# Altium PCB PCB2.PcbDoc
Units mil, origin at the board's own origin, x right, y up, seen from the top; angles counter-clockwise.
Board outline 2295 x 2275 mil, 2 copper layers (Top Layer, Bottom Layer); 65 components, 55 nets, 304 pads, 221 vias.
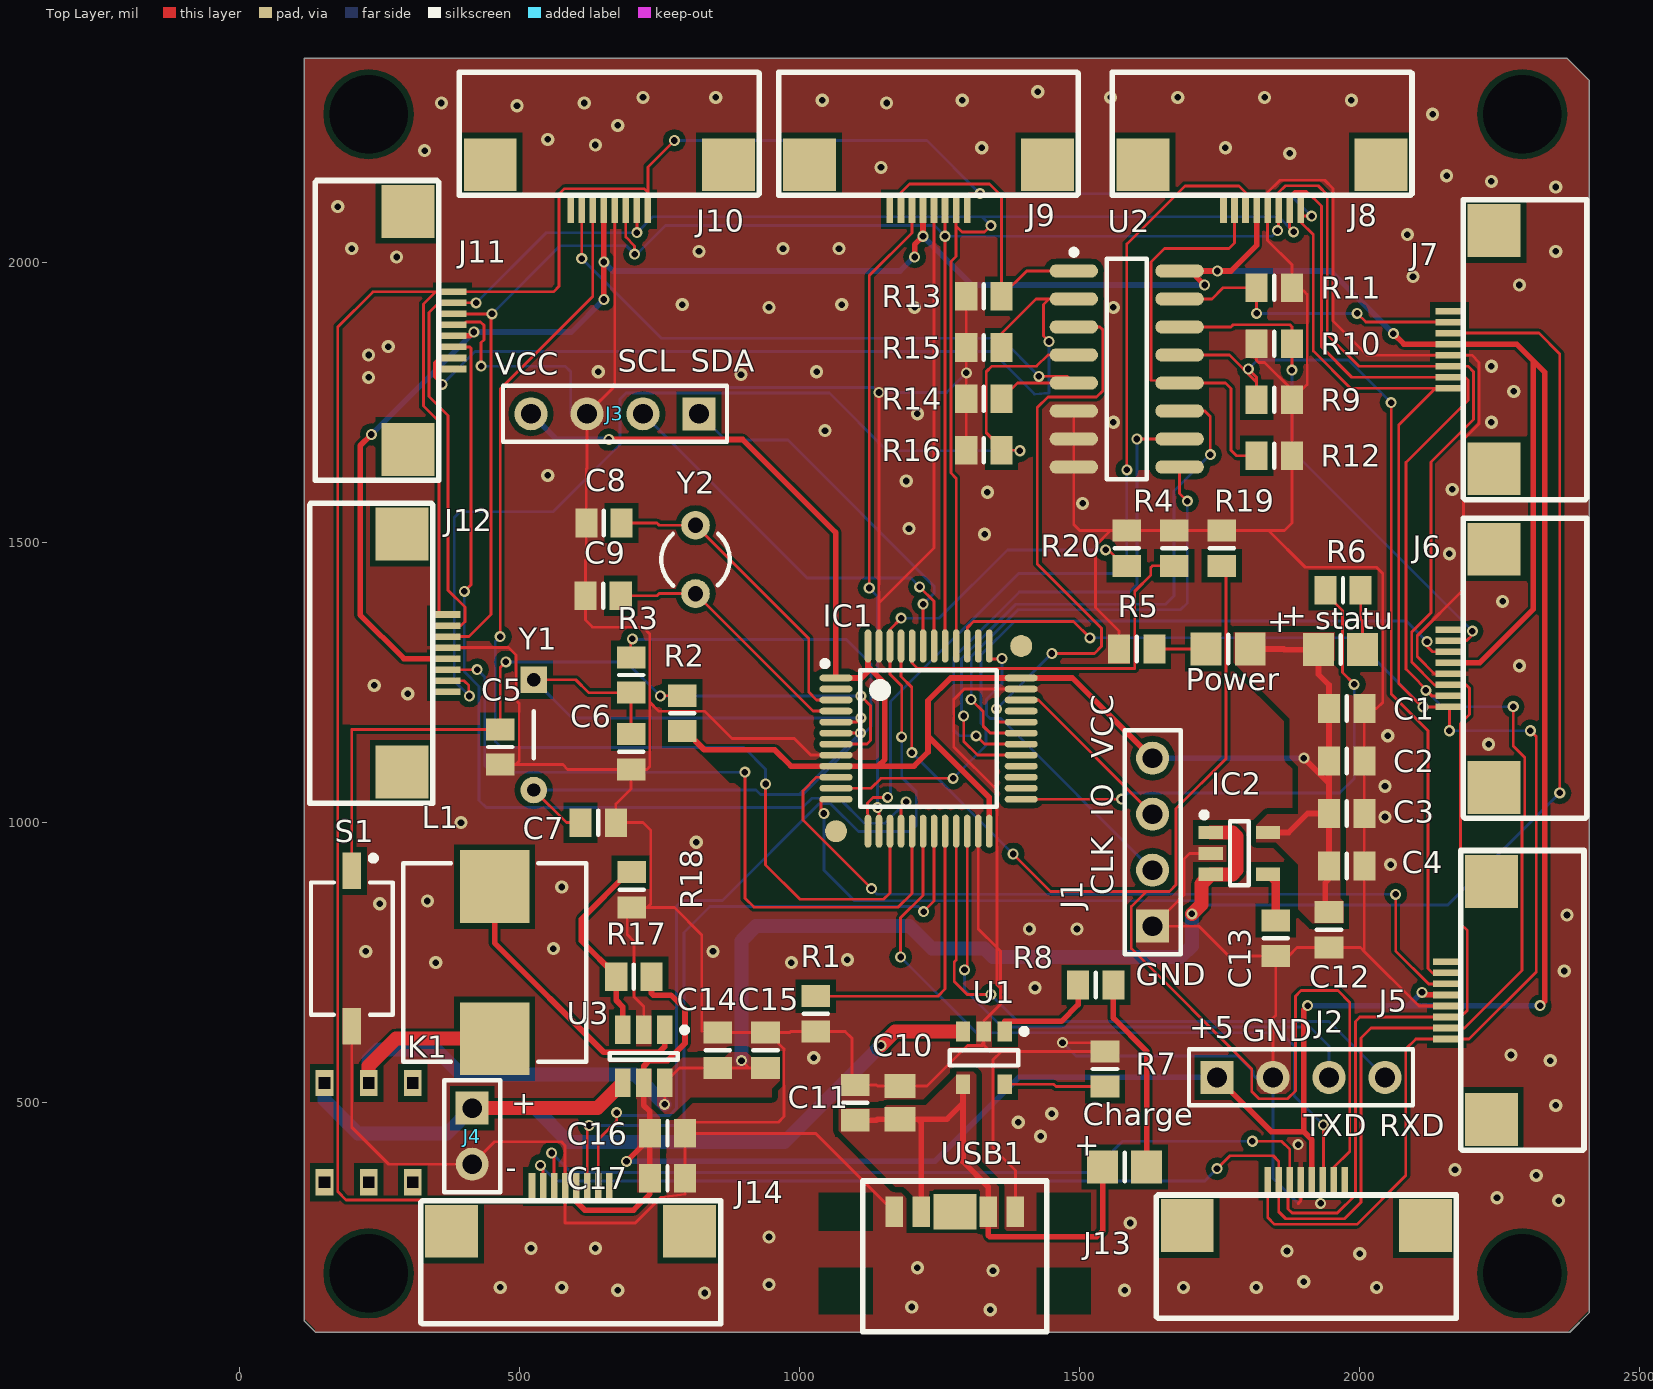
[diagram p0: Top Layer view]
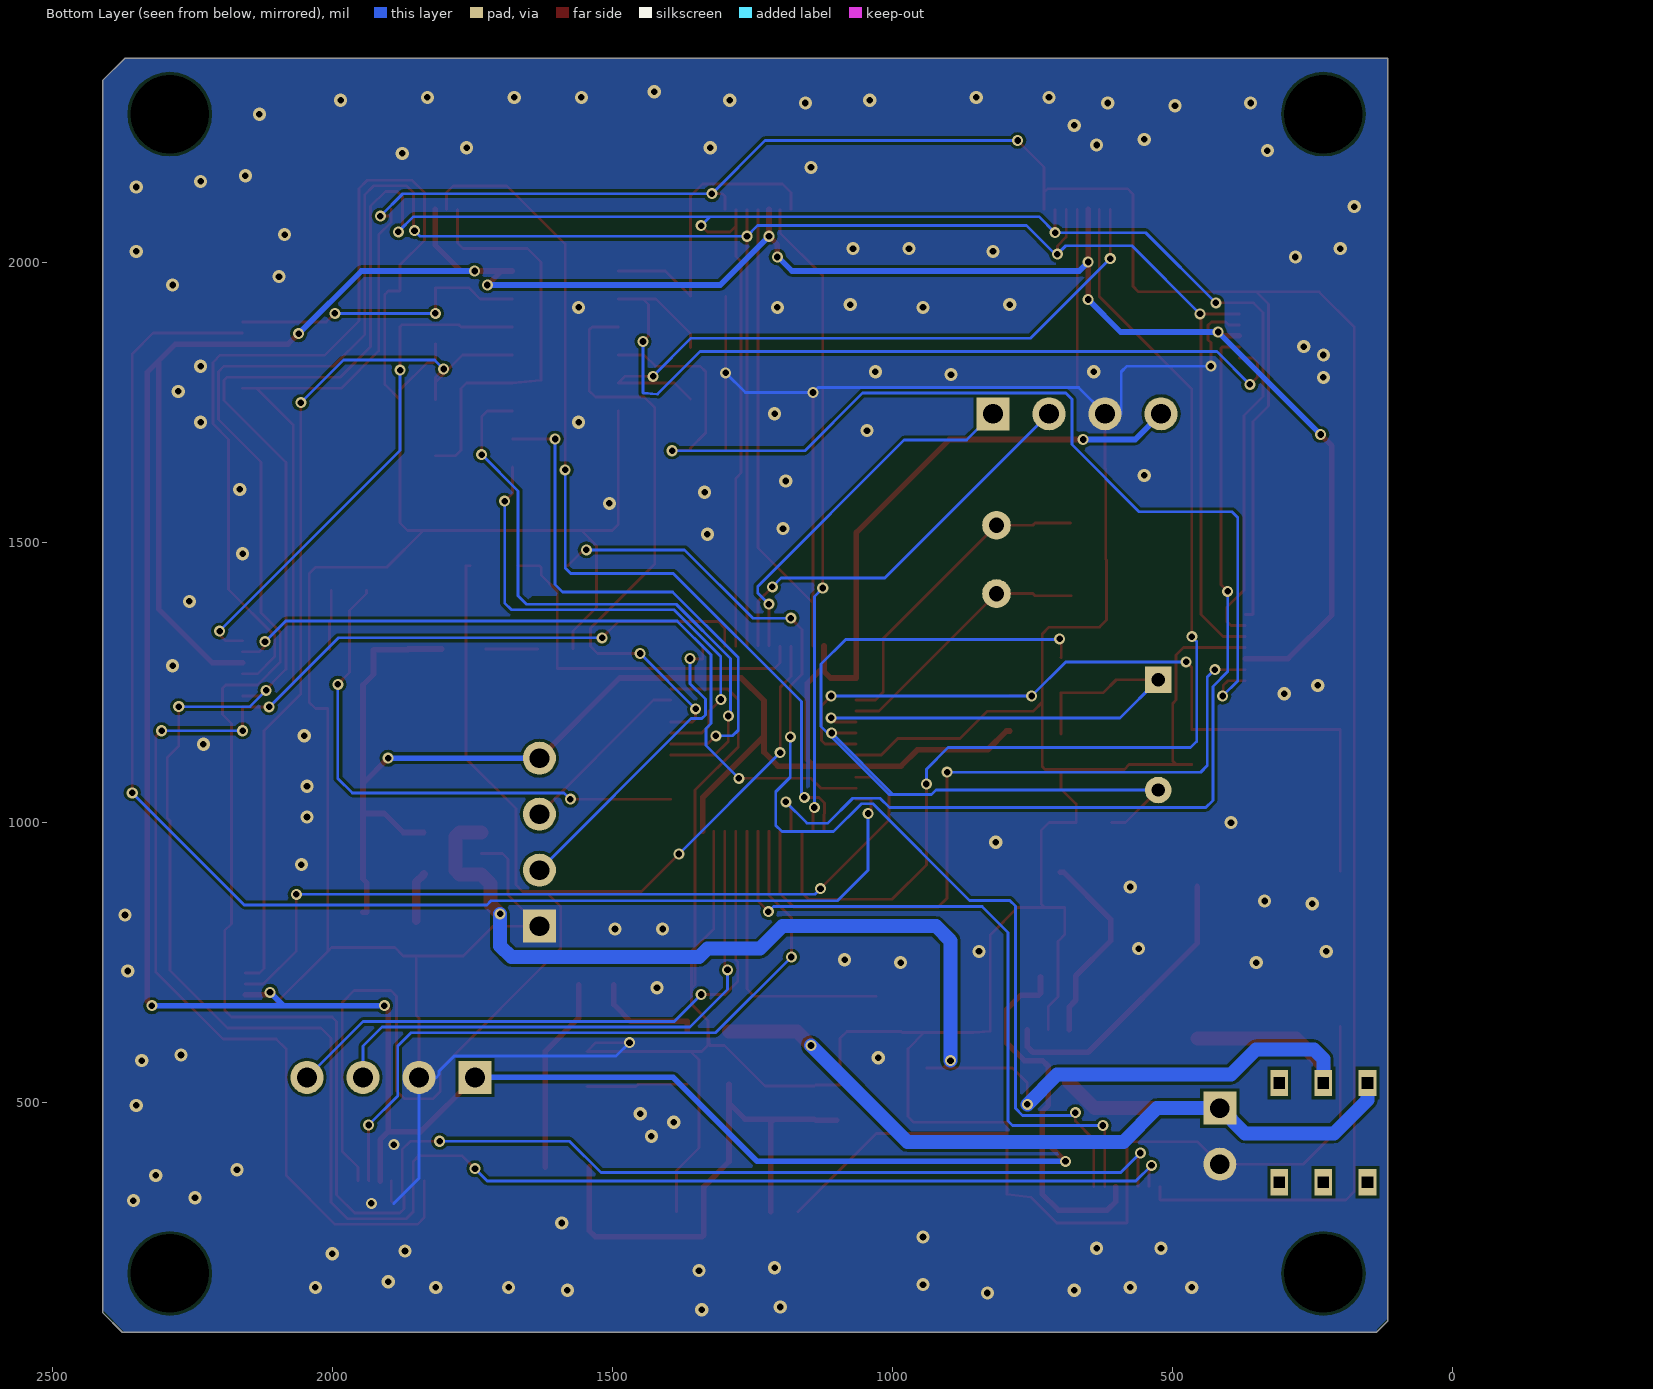
[diagram p1: Bottom Layer view, seen from below]

## Layer stack, top to bottom
Top Solder: solder mask 0.4, Solder Resist, Dk 3.5
Top Layer: signal copper 1.4
Dielectric 1: dielectric 12.6, FR-4, Dk 4.8
Bottom Layer: signal copper 1.4
Bottom Solder: solder mask 0.4, Solder Resist, Dk 3.5

## Board outline
115,110 135,90 2375,90 2410,125 2410,2325 2370,2365 115,2365

## Design rules (kind name [scope] priority, off if disabled: settings)
Clearance Clearance_3 [InNamedPolygon('Top Layer-BAT') Or  InNamedPolygon('Top Layer-No Net') Or  InNamedPolygon('Top Layer-POWER') Or  InNamedPolygon('Top Layer-GND') Or  InNamedPolygon('Top Layer-+5') Or  InNamedPolygon('Top Layer-VCC3.3')] p1: gap=5 ignorepadtopadclearanceinfootprint=FALSE except(10: SMDPad-THPad SMDPad-Fill SMDPad-Poly SMDPad-Region THPad-THPad THPad-Fill THPad-Poly THPad-Region Via-Fill Via-Poly Via-Region Fill-Fill Fill-Poly Fill-Region Poly-Poly Poly-Region Region-Region)
Clearance Clearance_1 [All] p2: gap=5 ignorepadtopadclearanceinfootprint=TRUE
PlaneConnect [All] p1: planeconnectstyle=Direct reliefexpansion=20 reliefentries=4 reliefconductorwidth=10 reliefairgap=10
PolygonConnect [All] p1: connectstyle=Direct reliefconductorwidth=10 reliefentries=4 polygonreliefangle="90 Angle" airgapwidth=10
RoutingVias [All] p1: holewidth=11.81 width=19.68 viastyle="Through Hole" minholewidth=15 minwidth=30 maxholewidth=20 maxwidth=50
SolderMaskExpansion [All] p1: expansion=4
Width [InNet('POWER')] p1: maxlimit=30 minlimit=10 preferedwidth=10 minimp=50.000000 maximp=50.000000 favimp=50.000000
Width Width_2 [InNetClass('All Nets')] p2: maxlimit=25 minlimit=5 preferedwidth=5 minimp=50.000000 maximp=50.000000 favimp=50.000000
29 further rules are at their usual default settings.

## Classes and differential pairs
net class Power: +5 BAT BAT+ POWER VCC3.3

## Components (designator, comment, footprint, x,y, rotation, side; value= is the part's Value field where it differs from the comment)
C1 "0.1uf" 6-0805_L 1976.5,1203.75 r180 top value=104
C2 "1uf" 6-0805_L 1976.5,1110 r180 top
C3 "0.1uf" 6-0805_L 1976.5,1016.25 r180 top value=104
C4 "0.1uf" 6-0805_L 1976.5,922.5 r180 top value=104
C5 "0.1uf" 6-0805_L 465,1135 r90 top value=104
C6 "22pF" 6-0805_L 698.75,1126.5 r90 top
C7 "22pF" 6-0805_L 640,1000 r180 top
C8 "22pF" 6-0805_L 650.25,1535 r0 top
C9 "22pF" 6-0805_L 648.75,1405 r0 top
C10 "1uF" C0805 1178.75,500 r90 top
C11 "0.1uf" 6-0805_L 1098.75,500 r270 top value=104
C12 "2.2uF" 6-0805_L 1945,808.5 r90 top
C13 "470pF" 6-0805_L 1850,793.5 r90 top
C14 "10uF" 6-0805_L 853.75,593.5 r270 top
C15 "0.1uF" 6-0805_L 938.75,593.5 r270 top
C16 "0.1uf" 6-0805_L 763.75,445 r180 top
C17 "22uf" 6-0805_L 763.75,365 r180 top
Charge "LED_Green" 6-0805_M 1580,385 r0 top (schematic designator D3)
IC1 "STM32F103C8T6" LQFP48 1230,1150 r0 top
IC2 "MIC5205-3.3" SOT-23-5 1785,945 r0 top
J1 "CON4" HDR1X4 1630,815 r90 top
J2 "蓝牙" HDR1X4 1745,545 r0 top
J3 "MPU6050" HDR1X4 820,1730 r180 top
J4 "BAT" HDR1X2 415,490 r270 top
J5 "CON7" 8P软排线 2155.28,682.4 r90 top
J6 "CON7" 8P软排线 2160,1275.47 r90 top
J7 "CON7" 8P软排线 2160,1844.53 r90 top
J8 "CON7" 8P软排线 1825.47,2095 r180 top
J9 "CON7" 8P软排线 1229.84,2095 r180 top
J10 "CON7" 8P软排线 659.84,2095 r180 top
J11 "CON7" 8P软排线 380,1878.9 r270 top
J12 "CON7" 8P软排线 369.72,1302.6 r270 top
J13 "CON7" 8P软排线 1904.53,360 r0 top
J14 "CON7" 8P软排线 590.79,350 r0 top
K1 "BUTTON" switch 308.74,535 r270 top
L1 "10UH" 0850 455,750 r90 top
Power "LED_Red" 6-0805_M 1765,1310 r180 top (schematic designator D1)
R1 "10K" 6-0805_L 1028.75,658.5 r270 top
R2 "10K" 6-0805_L 790,1195 r270 top
R3 "10M" 6-0805_L 698.75,1263.5 r90 top
R4 "10K" 6-0805_L 1668.75,1490 r270 top
R5 "1K" 6-0805_L 1601.5,1310 r0 top
R6 "1K" 6-0805_L 1970,1415 r0 top
R7 "330" 6-0805_L 1545,560 r90 top
R8 "330" 6-0805_L 1528.5,710 r0 top
R9 "10K" 6-0805_L 1847.25,1755 r180 top
R10 "10K" 6-0805_L 1847.25,1855 r0 top
R11 "10K" 6-0805_L 1847.25,1955 r180 top
R12 "10K" 6-0805_L 1847.25,1655 r180 top
R13 "10K" 6-0805_L 1328.75,1940 r0 top
R14 "10K" 6-0805_L 1328.75,1756.67 r0 top
R15 "10K" 6-0805_L 1328.75,1848.33 r0 top
R16 "10K" 6-0805_L 1328.75,1665 r0 top
R17 "525K" 6-0805_L 703.75,725 r180 top
R18 "100k" 6-0805_L 700,880 r270 top
R19 "10K" 6-0805_L 1753.75,1490 r270 top
R20 "10K" 6-0805_L 1583.75,1490 r270 top
S1 "KEY_2P" button 200,775 r270 top
statu "LED_Blue" 6-0805_M 1965.63,1308.94 r0 top (schematic designator D2)
U1 "PW4054" SOT-23-CT5_L 1328.75,580 r270 top
U2 "CD4051BCM" M16A_N 1583.75,1810 r0 top
U3 "PS7516" SOT23-6_M 721.35,582.76 r270 top
USB1 "USB" Type-C 1276.73,305 r0 top
Y1 "XTAL_8M" xtal 525,1255 r270 top
Y2 "XTAL_32.768K" R38 813.75,1470 r0 top

## Footprints (in the part's own frame and the unit in brackets; to place one, negate y for a bottom-side part, rotate by r counter-clockwise, add the part's x,y. Pads: shape width x height; smd on the part's side, far side on the other; paste and mask are expansions set on the pad)
6-0805_L [mm] "Chip Resistor, Body 2.0x1.2mm, IPC High Density"
  rect 1x1.3 smd: 1(-0.8,0) 2(0.8,0)
  silkscreen extent 0,-0.55 0,0.55, body extent -1.07,-0.7 1.07,0.7, height 0.7
6-0805_M [mm] "Chip Resistor, Body 2.0x1.2mm, IPC Low Density"
  rect 1.4x1.5 smd: 1(-1,0) 2(1,0)
  silkscreen extent 0,-0.65 0,0.65, body extent -1.07,-0.7 1.07,0.7, height 0.7
8P软排线 [mm] "8P母座"
  rect 0.3x1.25 smd: 1(-1.75,0) 2(-1.25,0) 3(-0.75,0) 4(-0.25,0) 5(0.25,0) 6(0.75,0) 7(1.25,0) 8(1.75,0)
  rect 2.4x2.4 smd: ""(-5.4,-2.025) ""(5.4,-2.025)
  silkscreen extent -6.8,-6.22 6.8,-0.64
0850 [mm] "电感"
  rect 3.3x3.15 smd: 1(-3.45,0) 2(3.45,0)
  silkscreen extent -4.5,-4.15 4.5,4.15, body extent -4.5,-4.15 4.5,4.15, height 5
button [mm] "SODFL, 2-Leads, Body 3.70x8.00mm, IPC Medium Density"
  rect 1.65x0.85 smd: 1(-3.525,0) 2(3.525,0)
  silkscreen extent -4.22,-1.85 3,1.85, body extent -3,-1.85 3,1.85, height 2.5
C0805 [mm] "Chip Capacitor, Body 2.0x1.3mm, IPC High Density"
  rect 1.1x1.4 smd: 1(-0.75,0) 2(0.75,0)
  body extent -1.1,-0.72 1.1,0.72, height 1.4
HDR1X2 [mm] "Connector; Header; 2 Position"
  rect 1.5x1.5 hole 0.9: 1(0,0)
  round 1.5 hole 0.9: 2(2.54,0)
  silkscreen extent -1.27,-1.27 3.81,1.27
HDR1X4 [mm] "Connector; Header; 4 Position"
  rect 1.5x1.5 hole 0.9: 1(0,0)
  round 1.5 hole 0.9: 2(2.54,0) 3(5.08,0) 4(7.62,0)
  silkscreen extent -1.27,-1.27 8.89,1.27, body extent -1.27,-1.27 8.89,1.27, height 8.38
LQFP48 [mm]
  oval 1.5x0.3 smd: 1(-4.2,2.75) 2(-4.2,2.25) 3(-4.2,1.75) 4(-4.2,1.25) 5(-4.2,0.75) 6(-4.2,0.25) 7(-4.2,-0.25) 8(-4.2,-0.75) 9(-4.2,-1.25) 10(-4.2,-1.75) 11(-4.2,-2.25) 12(-4.2,-2.75) 25(4.2,-2.75) 26(4.2,-2.25) 27(4.2,-1.75) 28(4.2,-1.25) 29(4.2,-0.75) 30(4.2,-0.25) 31(4.2,0.25) 32(4.2,0.75) 33(4.2,1.25) 34(4.2,1.75) 35(4.2,2.25) 36(4.2,2.75)
  oval 0.3x1.5 smd: 13(-2.75,-4.2) 14(-2.25,-4.2) 15(-1.75,-4.2) 16(-1.25,-4.2) 17(-0.75,-4.2) 18(-0.25,-4.2) 19(0.25,-4.2) 20(0.75,-4.2) 21(1.25,-4.2) 22(1.75,-4.2) 23(2.25,-4.2) 24(2.75,-4.2) 37(2.75,4.2) 38(2.25,4.2) 39(1.75,4.2) 40(1.25,4.2) 41(0.75,4.2) 42(0.25,4.2) 43(-0.25,4.2) 44(-0.75,4.2) 45(-1.25,4.2) 46(-1.75,4.2) 47(-2.25,4.2) 48(-2.75,4.2)
  round 1 smd: 49(-4.2,-4.2) 50(4.2,4.2)
  silkscreen extent -4.82,-3.1 3.1,3.52, body extent -4.49,-4.5 4.5,4.5, height 1.6
M16A_N [mm] "SOIC, 16-Leads, Body 9.9x3.9mm, Pitch 1.27mm, IPC Medium Density"
  oval 2.2x0.6 smd: 1(-2.4,4.445) 2(-2.4,3.175) 3(-2.4,1.905) 4(-2.4,0.635) 5(-2.4,-0.635) 6(-2.4,-1.905) 7(-2.4,-3.175) 8(-2.4,-4.445) 9(2.4,-4.445) 10(2.4,-3.175) 11(2.4,-1.905) 12(2.4,-0.635) 13(2.4,0.635) 14(2.4,1.905) 15(2.4,3.175) 16(2.4,4.445)
  silkscreen extent -2.52,-5 0.9,5.42, body extent -2,-5 2,5, height 1.75
R38 [mm] "Crystal, Thru-Hole; 2 Leads; Body 3.1 x 8.2 mm (Dia.xH)"
  round 1.3 hole 0.7: 1(0,1.55) 2(0,-1.55)
  silkscreen extent -1.55,-1.19 1.55,1.17
SOT23-6_M [mm] "SOT23, 6-Leads, Body 2.9x1.6mm, Pitch 0.95mm, Lead Span 2.7mm, IPC Low Density"
  rect 1.3x0.7 smd: 1(-1.2,0.95) 2(-1.2,0) 3(-1.2,-0.95) 4(1.2,-0.95) 5(1.2,0) 6(1.2,0.95)
  silkscreen extent -1.32,-1.55 0.15,1.98, body extent -0.9,-1.55 0.9,1.55, height 1.45
SOT-23-5 [mm]
  rect 1.1x0.6 smd: 1(-1.3,0.95) 2(-1.3,0) 3(-1.3,-0.95) 4(1.3,-0.95) 5(1.3,0.95)
  silkscreen extent -1.72,-1.45 0.42,1.87, body extent -1.37,-1.45 1.43,1.45, height 1.45
SOT-23-CT5_L [mm] "SOT23, 5-Leads, Body 2.9x1.6mm, Pitch 0.95mm, Lead Span 2.7mm, IPC High Density"
  rect 0.9x0.65 smd: 1(-1.2,0.95) 2(-1.2,0) 3(-1.2,-0.95) 4(1.2,-0.95) 5(1.2,0.95)
  silkscreen extent -1.32,-1.55 0.35,1.95, body extent -0.9,-1.55 0.9,1.55, height 1.45
switch [mm]
  rect 1.2x0.8 hole 0.5 square: 1(0,0) 2(0,-2) 3(0,-4) 4(4.5,0) 5(4.5,-2) 6(4.5,-4)
Type-C [mm] "贴片母头"
  rect 0.8x1.4 smd: 1(-2.75,0) 1(2.75,0) 2(-1.52,0) 2(1.52,0) ""(-0.5,0) ""(0.5,0)
  rect 1.95x1.2 smd: ""(0,0) ""(0,0)
  rect 1.95x1.6 smd: ""(0,0) ""(0,0)
  silkscreen extent -4.17,-5.44 4.17,1.4
xtal [mm]
  rect 1.2x1.2 hole 0.6: 1(0,0)
  round 1.2 hole 0.6: 2(5,0)
  silkscreen extent 1.43,0 3.56,0

## Part data
C1 C2 C3 C4 C5 C6 C7 C8 C9 C11 C12 C13 C14 C15 C16 C17: library part "Cap Semi", "Capacitor (Semiconductor SIM Model)", LatestRevisionDate=29-May-2009, LatestRevisionNote="IPC-7351 Footprint Added.", PackageDescription="Chip Capacitor", PackageReference=C1206, Published=8-Jun-2000, Publisher="Altium Limited"
C10: library part "Cap Pol3", "Polarized Capacitor (Surface Mount)", LatestRevisionDate=29-May-2009, LatestRevisionNote="IPC-7351 Footprint Added.", PackageDescription="Chip Capacitor", PackageReference=C0805, Published=8-Jun-2000, Publisher="Altium Limited"
Charge Power statu: library part LED, "LED"
IC1: "单片机", ComponentLink1Description="Manufacturer Link", ComponentLink1URL=www.st.com/stm32, ComponentLink2Description=Datasheet, ComponentLink2URL=http://www.st.com/stonline/products/literature/ds/13587.pdf, DatasheetVersion="rev6, Mar-2008", PackageDescription="48-Pin Low-Profile Quad Flat Pack, 7 x 7 mm Body, 0.5 mm Pitch (LQFP48)", PackageReference=LQFP48, PackageVersion=Mar-2008, Published=30-May-2008, Publisher="Altium Limited"
IC2: "稳压"
J1: "连接器"
J2 J3: library part CON4, "Connector"
J4 USB1: library part CON2, "Conjunctor"
J5 J6 J7 J8 J9 J10 J11 J12 J13 J14: "Connector"
K1: "自锁按键"
L1: library part Inductor, "电感"
R1 R2 R3 R4 R5 R6 R7 R8 R9 R10 R11 R12 R13 R14 R15 R16 R17 R18 R19 R20: library part Res3, "Resistor", LatestRevisionDate=29-May-2009, LatestRevisionNote="IPC-7351 Footprint Added.", PackageDescription="Chip Resistor", PackageReference=J1-0603, Published=8-Jun-2000, Publisher="Altium Limited"
S1: "轻触按键2P"
U2: "8-Channel Analog Multiplexer/Demultiplexer", Code_IPC=SOIC127P600-16, ComponentLink1Description="Manufacturer Link", ComponentLink1URL=http://www.fairchildsemi.com/, ComponentLink2Description=Datasheet, ComponentLink2URL=http://www.fairchildsemi.com/ds/CD%2FCD4052BC.pdf, DatasheetVersion=Jan-1999, LatestRevisionDate=13-Apr-2006, LatestRevisionNote="IPC-7351 Footprint Added.", PackageDescription="16-Pin Small Outline Integrated Circuit 1.27 mm Pitch", PackageReference=M16A, PackageVersion=2000, Published=17-Jul-2002, Publisher="Altium Limited"
Y1 Y2: library part XTAL, "Crystal Oscillator", LatestRevisionDate=17-Jul-2002, LatestRevisionNote="Re-released for DXP Platform.", PackageDescription="Crystal, Thru-Hole; 2 Leads; Body 3.1 x 8.2 mm (Dia.xH)", PackageReference=R38, Published=8-Jun-2000, Publisher="Altium Limited"

## Free pads (board coordinates)
  rect 47.24x31.5 hole 140: ""(230,195) ""(230,2265) ""(2290,195) ""(2290,2265)

## Via types
v1: diameter 23.62, hole 11.81, Top Layer to Bottom Layer, tented both sides, 116 vias
v2: diameter 19.68, hole 11.81, Top Layer to Bottom Layer, tented both sides, 105 vias

## Nets (pads, with @x,y where several pads share a name; then routed paths per layer and width w, separated by ;. In a path a pad name is that pad's centre, name@x,y a point inside that pad or via, vN(x,y) a via of type N, cw(c..) or ccw(c..) an arc to the next point about the centre after c; other vN are vias at no path point)
+5: C16.2 C17.2 J2.1 J5.5 J6.5 J7.5 J8.5 J9.5 J10.5 J11.5 J12.5 J13.5 J14.5 R17.1 U2.16 U3.5 | length 7969.5
  Top Layer w10: v2(235,1693) 215,1673 215,1370.76 293,1292.76 J12.5 ; J11.5 411.06,1869.06 v2(418,1876) ; J14.5 600.63,323.26 616,307.89 703.15,307.89 732.25,337 C17.2 C16.2@732.25,436.75 ; v2(650,1934) v2(650,2001) J10.5 ; v2(690.51,395) C16.2@732.25,436.75 ; R17.1 735.25,695 738.25,692 770,692 795,667 795,606 764,575 731.35,575 721.35,565 U3.5 721.35,494.91 732.25,484 C16.2 C16.2@732.25,436.75 ; v2(1205,2010) 1205,2032 v2(1220,2047) J9.5 ; U2.16 U2.16@1698,1985 ; v2(1723,1960) U2.16@1698,1985 ; J2.1 1842,448 1900,448 ; J8.5 1815.63,2030.63 1770,1985 v2(1745.47,1985) U2.16@1698,1985 ; v2(1907,673) 1900,666 1900,448 ; J13.5 1914.37,433.63 1900,448 ; v2(2060,1873) 2078.63,1854.37 J7.5 2280,1854.37 2310,1824.37 ; v2(2111,697) 2115.76,692.24 J5.5 ; J6.5 2214,1285.31 2310,1381.31 2310,1824.37 ; v2(2322,673) 2330,681 2330,1804.37 2310,1824.37
  Bottom Layer w10: v2(235,1693) v2(418,1876) 592,1876 v2(650,1934) ; v2(650,2001) 666,1985 1179,1985 1204,2010 v2(1205,2010) ; v2(690.51,395) 1241,395 1391,545 J2.1 ; v2(1220,2047) 1307,1960 v2(1723,1960) ; v2(1745.47,1985) 1948,1985 v2(2060,1873) ; v2(1907,673) 2087,673 ; v2(2111,697) 2087,673 ; v2(2322,673) 2087,673
ADC0: IC1.10 J5.6 | length 1451.4
  Top Layer w5: IC1.10 1030,1081.1 1005.66,1056.76 1005.66,1004.34 v2(1128,882) ; v2(2064,872) 2064,770.93 2123,711.93 J5.6
  Bottom Layer w5: v2(1128,882) 1138,872 v2(2064,872)
ADC1: IC1.11 J6.6 | length 1353.7
  Top Layer w5: IC1.11 1127.44,1061.42 1145.05,1079.03 v2(1273.72,1079.03) ; v2(2120,1323) 2120,1315 2130,1305 J6.6
  Bottom Layer w5: v2(1273.72,1079.03) 1332.34,1137.66 1332.34,1168.06 1323.64,1176.77 1323.64,1299.64 1384,1360 2083,1360 v2(2120,1323)
ADC2: IC1.12 J7.6 | length 2574.3
  Top Layer w5: v2(1043,1016.22) 1038,1021.22 1038,1041.73 IC1.12 ; J7.6 2319.94,1874.06 2357,1837 v2(2357,1053)
  Bottom Layer w5: v2(1043,1016.22) 1043,915 1097.66,860.34 1716.26,860.34 1723.61,853 2157,853 v2(2357,1053)
ADC3: IC1.13 J8.6 | length 1652.6
  Top Layer w5: IC1.13 1121.73,995 1121,1035 1131,1045 v2(1157,1045) ; v2(1584,1630) 1584,2033 1688,2137 1783.94,2137 1795.94,2125 J8.6
  Bottom Layer w5: v2(1157,1045) 1162,1050 1162,1216 1391,1445 1574,1445 1584,1455 v2(1584,1630)
ADC4: IC1.14 J9.6 | length 1149.2
  Top Layer w5: v2(1124,1419) 1124,1976.69 1200.31,2053 J9.6 ; v2(1139,1027) 1141.42,1024.58 IC1.14
  Bottom Layer w5: v2(1124,1419) 1139,1404 v2(1139,1027)
ADC5: IC1.15 J10.6 | length 2058.4
  Top Layer w5: v2(465,1332) 465,1774 630.31,1939.31 J10.6 ; v2(939,1069) 939,924.31 1000,863.31 1150,863.31 1161.1,874.41 IC1.15
  Bottom Layer w5: v2(465,1332) 456.34,1323.34 456.34,1145 467.34,1134 900.18,1134 939,1095.18 v2(939,1069)
ADC6: IC1.16 J11.6 | length 1722.1
  Top Layer w5: J11.6 410.63,1849.37 412.68,1847.32 412.68,1424.68 v2(401,1413) ; IC1.16 1180.79,1027.79 v2(1190,1037)
  Bottom Layer w5: v2(401,1413) 401,1269.4 427.34,1243.05 427.34,1039.66 440,1027 1005,1027 1021.57,1043.57 1070.34,1043.57 1114.91,999 1152,999 v2(1190,1037)
ADC7: IC1.17 J12.6 | length 1352.1
  Top Layer w5: J12.6 v2(424,1273.07) ; v2(902,1090) 902,865 918.03,848.97 1175.86,848.97 1200.47,873.58 IC1.17
  Bottom Layer w5: v2(424,1273.07) 437.34,1259.73 437.34,1101.66 449,1090 v2(902,1090)
ADC8: IC1.18 J13.6 | length 1273.1
  Top Layer w5: v2(1180,760) 1180,830 1220.16,870.16 IC1.18 ; J13.6 1935,360.94 v2(1935,460)
  Bottom Layer w5: v2(1180,760) 1315.22,624.78 1859.22,624.78 1883,601 1883,512 v2(1935,460)
ADC9: IC1.19 J14.6 | length 1222.4
  Top Layer w5: J14.6 620.32,455.45 v2(624,459.13) ; v2(1221,841) 1239.84,859.84 IC1.19
  Bottom Layer w5: v2(624,459.13) 785.13,459.13 793,467 793,804 839.34,850.34 1211.66,850.34 v2(1221,841)
Address_0: IC1.29 U2.11 | length 1094
  Top Layer w5: v2(1292.66,1190.34) 1292.66,1145 1317.18,1120.47 IC1.29 ; U2.11 1723,1735 1733,1725 v2(1733,1657)
  Bottom Layer w5: v2(1292.66,1190.34) 1288.66,1194.34 1288.66,1292.94 1385.71,1390 1653,1390 1668,1405 1668,1592 v2(1733,1657)
Address_1: IC1.30 U2.10 | length 977.7
  Top Layer w5: v2(1315,1155) 1329.84,1140.16 IC1.30 ; v2(1602,1685) U2.10
  Bottom Layer w5: v2(1315,1155) 1285,1155 1275,1165 1275,1295 1392,1412 1589,1412 1602,1425 v2(1602,1685)
Address_2: IC1.31 U2.9 | length 880.1
  Top Layer w5: v2(1306,1219.77) 1327.69,1198.08 1327.69,1172.16 1340,1159.84 IC1.31 ; U2.9 1678.24,1587.76 v2(1692,1574)
  Bottom Layer w5: v2(1306,1219.77) 1306,1296.14 1389.86,1380 1680,1380 1692,1392 v2(1692,1574)
Address_3: IC1.39 J5.1 J6.1 J7.1 J8.1 J9.1 J10.1 J11.1 J12.1 J13.1 J14.1 | length 8291.1
  Top Layer w5: J12.1 356,1371.5 356,1716 327.89,1744.11 327.89,1925.89 349.8,1947.8 ; J14.1 521.89,326 190,326 175,341 175,1885 237.8,1947.8 349.8,1947.8 ; J10.1 728.74,2125 ; v2(776,2218) 728.74,2170.74 728.74,2125 ; J9.1 1298.74,2119 1302.74,2123 v2(1322,2123) ; IC1.39 1298.9,1347.9 1310,1359 1489,1359 v2(1518,1330) ; J13.1 1835.63,295 1847.97,282.66 1994.66,282.66 2082.03,370.03 2082.03,595.53 2100,613.5 J5.1 2195,613.5 2315,733.5 2315,1153.47 v2(2304.47,1164) ; J8.1 J8.1@1894.37,2083 ; v2(1914,2083) J8.1@1894.37,2083 ; v2(2160,1164) J6.1 v2(2112.43,1206.57) 2111.43,1206.57 2069.46,1248.54 2069.46,1710.09 2135,1775.63 ; J7.1 2135,1775.63 ; 349.8,1947.8 J11.1 560,1947.8 570,1957.8 570,2122 580,2132 721.74,2132 728.74,2125 ; J8.1@1894.37,2083 1894.37,2072.34 1917,2049.71 1917,1842 1983.37,1775.63 2135,1775.63
  Bottom Layer w5: v2(776,2218) 1227,2218 v2(1322,2123) 1874,2123 v2(1914,2083) ; v2(1518,1330) 1989,1330 v2(2112.43,1206.57) ; v2(2160,1164) v2(2304.47,1164)
Address_4: IC1.40 J5.2 J6.2 J7.2 J8.2 J9.2 J10.2 J11.2 J12.2 J13.2 J14.2 | length 7439.7
  Top Layer w5: J12.2 395,1351.81 402,1358.81 402,1385 372,1415 372,1727 337.89,1761.11 337.89,1911 355,1928.11 J11.2 v2(422,1928.11) ; v2(537,388) 541.57,383.43 J14.2 ; v2(709.06,2053.34) J10.2 ; J9.2 1279.06,2065 ; IC1.40 1279.21,1614.79 1270,1624 1270,2001.94 1279.06,2011 1279.06,2065 ; v2(1341,2066) 1329.62,2054.62 1289.43,2054.62 1279.06,2065 ; v2(1745,382) 1768,405 1845.32,405 1855.32,395 J13.2 1855.32,305 1867.66,292.66 1972.66,292.66 2002.03,322.03 2002.03,615.22 2020,633.19 J5.2 2186.94,633.19 2289.75,736 2289.75,1003.28 2294.47,1008 2294.47,1116.53 2274,1137 v2(2274,1207) ; v2(1882,2055) 1874.69,2062.31 J8.2 1874.69,2118 1883.79,2127.11 1905,2127.11 1931.34,2100.76 1931.34,1849.66 1985.68,1795.32 J7.2 2187.68,1795.32 2193,1790 2193,1754 2082.31,1643.31 2082.31,1273.95 2130,1226.26 ; v2(2118,1236) 2127.74,1226.26 2130,1226.26 ; J6.2 2130,1226.26
  Bottom Layer w5: v2(422,1928.11) 547.23,2053.34 v2(709.06,2053.34) 737.71,2082 1325,2082 ; v2(537,388) 565,360 1723,360 v2(1745,382) ; v2(1341,2066) 1325,2082 ; v2(1882,2055) 1855,2082 1325,2082 ; v2(2118,1236) 2147,1207 v2(2274,1207)
Address_5: IC1.41 J5.3 J6.3 J7.3 J8.3 J9.3 J10.3 J11.3 J12.3 J13.3 J14.3 | length 7225.6
  Top Layer w5: J12.3 409.13,1332.13 448.69,1371.69 v2@448.69,1908.43 ; J11.3 v2@448.69,1908.43 ; v2(450.43,1908.43) v2@448.69,1908.43 ; v2(557,410) 561.26,405.74 J14.3 ; J10.3 689.37,2045.37 705,2029.74 v2(705,2015) ; J9.3 v2(1259.37,2047) IC1.41 ; v2(1808,431) 1860,431 1875,416 J13.3 1875,338 1872,335 1872,310 1879.34,302.66 1959.66,302.66 1992.03,335.03 1992.03,644.9 2000,652.87 J5.3 2180,652.87 2192,664.87 2192,807 2180,819 2180,1177 2196,1193 2196,1240 2190.06,1245.94 J6.3 2133.44,1245.94 2092.66,1286.73 2092.66,1340.34 2127,1374.69 2127,1643.68 2203,1719.68 2203,1805 2193,1815 J7.3 1998,1815 1942,1871 1942,2120.87 1925.76,2137.11 1867.11,2137.11 1855,2125 J8.3 1855,2059 v2(1853,2057)
  Bottom Layer w5: v2(450.43,1908.43) 572,2030 690,2030 v2(705,2015) 709,2015 760,2066 1240.37,2066 v2(1259.37,2047) 1843,2047 v2(1853,2057) ; v2(557,410) 592,375 1520,375 1576,431 v2(1808,431)
BAT: J4.1 K1.3 U1.3 U3.4 | length 1607.9
  Top Layer w25: J4.1 638.43,490 U3.4 ; v2(1145,602) 1170.24,627.24 U1.3
  Bottom Layer w25: K1.3 151.26,505 211.26,445 370,445 J4.1 527,490 587,430 973,430 v2(1145,602)
BAT+: C14.2 C15.2 IC2.1 IC2.3 K1.2 L1.1 U3.6 | length 2502.5
  Top Layer w5: v2(758.75,497) U3.6 785.25,562.01 C14.2 908.99,562.01 ; v2(896,575) 908.99,562.01 ; C15.2 908.99,562.01
  Top Layer w25: K1.2 230,565 279.17,614.17 L1.1 ; v2(1700,837) 1717,854 1717,890.78 IC2.3 1772.6,907.6 1780,915 1780,975 1772.6,982.4 IC2.1
  Bottom Layer w25: K1.2 230,577.84 247.16,595 350,595 395,550 705.75,550 v2(758.75,497) ; v2(896,575) 896,789 922,815 1196,815 1236,775 1330,775 1345,760 1680,760 1700,780 v2(1700,837)
BOOT0: IC1.44 R4.2 | length 667.5
  Top Layer w5: IC1.44 1200.47,1285 1210.47,1275 1598,1275 1598,1413 1626.84,1441.84 1626.84,1455.35 1630,1458.5 R4.2
BOOT1: IC1.20 R1.1 | length 517.8
  Top Layer w5: R1.1 1246.54,690 1259.53,702.98 IC1.20
Common_Out: IC1.32 U2.3 | length 1064.9
  Top Layer w5: v2(1351,1203) 1351,1185 1356.47,1179.53 IC1.32 ; v2(1450,1302) 1526,1302 1539,1315 1539,1347 1424,1462 1424,1741 1443,1760 1530,1760 1541,1771 1541,1880 1536,1885 U2.3
  Bottom Layer w5: v2(1351,1203) v2(1450,1302)
EX0: J5.7 R9.2 U2.13 | length 1586.3
  Top Layer w5: U2.13 1767,1835 1815.76,1786.24 ; v2(1801,1810) 1815.76,1795.24 1815.76,1786.24 ; R9.2 1815.76,1786.24 ; v2(2056,1750) 2056,1230 2122,1164 2122,739.61 2130,731.61 J5.7
  Bottom Layer w5: v2(1801,1810) 1817,1826 1980,1826 v2(2056,1750)
EX1: J6.7 R10.2 U2.14 | length 932.7
  Top Layer w5: U2.14 1770,1885 1774,1889 1875,1889 1878.75,1885.25 R10.2 v2(1878.75,1808) ; J6.7 2190.69,1324.69 2201,1335 v2(2201,1342)
  Bottom Layer w5: v2(1878.75,1808) 1878.75,1664.25 v2(2201,1342)
EX2: J7.7 R11.2 U2.15 | length 542.2
  Top Layer w5: U2.15 1736,1935 1756,1955 R11.2 v2(1815.76,1909.24) ; v2(1995.26,1909.24) 2010.76,1893.74 J7.7
  Bottom Layer w5: v2(1815.76,1909.24) v2(1995.26,1909.24)
EX3: J8.7 R12.2 U2.12 | length 741.6
  Top Layer w5: J8.7 1776.26,2035 1766.26,2025 1651,2025 1627,2001 1627,1790 U2.12 1760,1785 1770,1775 1770,1665 1780,1655 R12.2
EX4: J9.7 R13.2 U2.1 | length 551.6
  Top Layer w5: J9.7 1180.63,2125 1196.06,2140.43 1339,2140.43 1360.25,2119.18 R13.2 1405.25,1985 U2.1
EX5: J10.7 R14.2 U2.5 | length 1199.3
  Top Layer w5: v2(610.63,2007) J10.7 ; R14.2 1388.58,1785 U2.5 1477.26,1797 v2(1427,1797)
  Bottom Layer w5: v2(610.63,2007) 752.63,1865 1359,1865 v2(1427,1797)
EX6: J11.7 R15.2 U2.2 | length 1575.4
  Top Layer w5: v2(361.45,1782.45) 347.89,1796 347.89,1821.58 356,1829.69 J11.7 ; R15.2 1360.25,1873.25 1422,1935 1445,1935 ; v2(1445,1859) 1435,1869 1435,1925 1445,1935 ; U2.2 1445,1935
  Bottom Layer w5: v2(361.45,1782.45) 420,1841 1343,1841 1419,1765 1445,1767 v2(1445,1859)
EX7: J12.7 R16.2 U2.4 | length 1937.6
  Top Layer w5: J12.7 400.61,1253.39 409,1245 409,1227 v2(410,1226) ; v2(1393,1664) 1392,1665 R16.2 1360.25,1669 1333,1696.25 1333,1805 1343,1815 1423,1815 1443,1835 U2.4
  Bottom Layer w5: v2(410,1226) 383,1253 383,1545 393,1555 559,1555 679,1675 679,1756.03 690,1767.03 1052.97,1767.03 1156,1664 v2(1393,1664)
EX8: IC1.45 J13.7 R19.2 | length 2547.6
  Top Layer w5: IC1.45 1180.79,1261 1200,1241.79 v2(1200,1125) ; v2(1381,944) 1448,877 1619,877 ; R19.2 1761,1458.5 1761,1114 1672,1025 1672,889 1660,877 1619,877 ; J13.7 1953.74,384.74 1982.03,413.03 1982.03,678.97 1961,700 1895,700 1885,690 1885,521 1871,507 1820,507 1807,520 1807,560 1592,775 1592,850 1619,877
  Bottom Layer w5: v2(1200,1125) v2(1381,944)
EX9: IC1.46 J14.7 R20.2 | length 2012.7
  Top Layer w5: J14.7 640,434 673,467 v2(673,482.13) ; v2(1181.1,1365) 1161.1,1345 IC1.46 1161.1,1265 1182,1244.1 v2(1182,1153) ; v2(1546,1487) 1551.5,1487 1580,1458.5 R20.2
  Bottom Layer w5: v2(673,482.13) 678.13,477 767.03,477 780,489.97 780,851 790,861 862,861 1034.57,1033.57 1055,1033.57 1104.57,984 1197,984 1208,995 1208,1055 1182,1081 v2(1182,1153) ; v2(1181.1,1365) 1248.85,1365 1370.85,1487 v2(1546,1487)
GND: C1.1 C2.1 C3.1 C4.1 C5.1 C6.1 C7.1 C8.1 C9.1 C10.2 C11.1 C12.1 C13.1 C14.1 C15.1 C16.1 C17.1 IC1.8 IC1.23 IC1.35 IC1.47 IC2.2 J1.1 J2.2 J3.3 J4.2 J5.4 J6.4 J7.4 J8.4 J9.4 J10.4 J11.4 J12.4 J13.4 J14.4 R1.2 R4.1 R5.1 R7.2 R9.1 R10.1 R11.1 R12.1 R13.1 R14.1 R15.1 R16.1 R18.2 R19.1 R20.1 S1.2 U1.2 U2.6 U2.7 U2.8 U3.2 USB1.1 | length 15482.8
  Top Layer w5: S1.2 200,456 266,390 J4.2 455.03,430.03 574.34,430.03 580.94,423.43 J14.4 580.94,285 706.25,285 752.25,331 795.25,336.25 C17.1 C16.1 ; J12.4 480,1312.44 493,1299.44 493,1219 499,1213 499,1110 492.5,1103.5 ; J11.4 399,1888.74 404.26,1894 430,1894 436,1888 436,1862 431,1857 v2(431,1815) ; C5.1 492.5,1103.5 ; J10.4 669.69,1779.69 J3.3 620,1632.25 618.75,1631 C8.1 618.75,1470.5 617.25,1469 C9.1 617.25,1361.75 630,1349 720,1349 732,1337 732,1215 ; U3.2 721.35,671.65 704,689 704,788 692,800 692,848.5 R18.2 727.5,848.5 ; IC1.8 1019.53,1120.47 990,1150 879,1150 830,1199 748,1199 732,1215 ; IC1.47 1141.42,1392 ; v2(1141.42,1768) 1141.42,1392 ; USB1.1@1168.46,305 1028.46,445 C16.1 ; J9.4 1239.69,1490.27 1141.42,1392 ; R16.1 R14.1 v2(1297.25,1803) R15.1 R13.1 ; IC1.23 1318.58,810.17 1352,776.75 ; USB1.1@1385,305 1385,379 1345,419 1345,576.5 1360,591.5 ; IC1.35 1293.58,1238.58 1275,1220 1275,1135 1352,1058 1352,776.75 ; v2(1469,607) 1529.5,607 R7.2 1360,591.5 ; U2.6 U2.7 U2.8 1489.26,1532.23 1500,1521.5 1555,1521.5 ; R5.1 1570,1341.97 1527.97,1384 1527.97,1494.47 1555,1521.5 ; IC2.2 1696,945 1686,935 1686,871 J1.1 1713,815 1765.99,762.01 C13.1 ; R10.1 1815.76,1825 1818.95,1821.81 1829.94,1821.81 1878.75,1773 R9.1 ; J2.2 1845,651 1850,656 C13.1 ; 1890,320 1894.69,324.69 J13.4 ; J5.4 2105.44,672.56 ; J6.4 2133.37,1265.63 2102.66,1296.34 2102.66,1333.66 2184.98,1415.98 2184.98,1684.15 2213,1712.18 2213,1821.69 2200,1834.69 J7.4 2013.15,1834.69 1952,1895.83 1952,2132.51 1937.4,2147.11 1857.42,2147.11 1835.31,2125 J8.4 1835.31,2039.66 1878.75,1996.22 R11.1 1878.75,1949 1900,1949 1906,1943 1906,1782.25 R9.1 ; 492.5,1103.5 577,1103.5 585.5,1095 C6.1 ; C6.1 727,1095 732,1100 732,1215 ; C6.1 698.75,1060.25 671.5,1033 C7.1 720,1000 734,986 734,855 727.5,848.5 ; 727.5,848.5 776,848.5 825,799.5 825,627.5 C14.1 C15.1 C15.1@943,625 ; C16.1 795.25,465 962,465 972,475 972,596 C15.1@943,625 ; C15.1@943,625 982,625 984.01,627.01 R1.2 1080.99,627.01 1093,615 1093,531.5 C11.1 1137,531.5 1138.97,529.53 C10.2 1227,529.53 1299.47,602 1325.75,602 ; 1325.75,602 1327.62,603.87 ; 1325.75,602 U1.2 ; 1327.62,603.87 1328.75,605 U1.2 ; 1327.62,603.87 1340,591.5 1360,591.5 ; U1.2 1328.75,646.06 1358.34,675.66 1358.34,704 ; 1352,776.75 1352,710.34 1358.34,704 ; 1352,776.75 1358.34,770.41 1358.34,704 ; 1555,1521.5 R20.1 R4.1 R19.1 1837,1521.5 ; 1837,1521.5 1865.25,1521.5 1878.75,1535 R12.1 R9.1 ; 1837,1521.5 1902.5,1456 2030,1456 2041,1445 2041,1214.75 2030,1203.75 C1.1 C2.1 C3.1 C4.1 2007.99,770.01 ; C13.1 1873,762.01 1888,777.01 C12.1 2000.99,777.01 2007.99,770.01 ; 2007.99,770.01 2105.44,672.56 ; 2007.99,770 2105.43,672.56
  Bottom Layer w5: v2(431,1815) 581,1815 591,1805 591,1730 J3.3 667.03,1777.03 1132.39,1777.03 v2(1141.42,1768) 1262.25,1768 v2(1297.25,1803) ; v2(1469,607) 1493,583 1782,583 1809,556 1809,550 1814,545 J2.2 1845,365 1890,320
  other v1: 1340,130 1200,135 830,160 675,165 1580,165 465,170 575,170 1685,170 1815,170 2030,170 945,175 1900,180 1345,200 1210,205 2000,230 1870,235 520,240 635,240 945,260 1590,285 2355,325 2245,330 2315,370 2170,380 1430,440 1390,465 1450,480 2350,495 2340,575 1025,580 2270,585 1420,705 2365,735 350,750 985,750 1085,755 225,770 845,770 560,775 1410,810 1495,810 2370,835 250,855 335,860 575,885 2055,925 815,965 395,1000 2045,1010 2045,1065 2230,1140 2050,1155 300,1230 240,1245 2285,1280 2255,1395 2160,1480 1330,1515 1195,1525 1505,1570 1335,1590 2165,1595 1190,1610 550,1620 1045,1700 1560,1715 2235,1715 1210,1730 2275,1770 230,1795 895,1800 640,1805 1030,1805 2235,1815 230,1835 265,1850 945,1920 1205,1920 1560,1920 790,1925 1075,1925 2285,1960 2095,1975 280,2010 820,2020 2350,2020 200,2025 970,2025 1070,2025 2085,2050 175,2100 2350,2135 2235,2145 2155,2155 1145,2170 1875,2195 330,2200 1325,2205 1760,2205 635,2210 550,2220 675,2245 2130,2265 495,2280 360,2285 615,2285 1155,2285 1040,2290 1290,2290 1985,2290 720,2295 850,2295 1555,2295 1675,2295 1830,2295 1425,2305
  other v2: 1930,320 1890,425
NetC13_2: C13.2 IC2.4 | length 88.3
  Top Layer w15: IC2.4 1850,893.78 C13.2
NetCharge_2: Charge.2 R8.2 | length 349.6
  Top Layer w10: R8.2 1560,651 1619.37,591.63 Charge.2
NetIC1_34: IC1.34 J1.3 | length 319.1
  Top Layer w5: IC1.34 1426.1,1218.9 J1.3
NetIC1_37: IC1.37 J1.2 | length 569.9
  Top Layer w5: IC1.37 1338.27,1292 1360,1292 v2(1361,1293)
  Bottom Layer w5: v2(1361,1293) 1361,1247.91 1333.64,1220.55 1333.64,1192.02 1340,1185.66 1359.34,1185.66 J1.2
NetL1_2: L1.2 U3.1 | length 519.6
  Top Layer w10: L1.2 455,785 650,590 749,590 758.75,599.75 U3.1
NetPower_2: Power.2 R5.2 | length 92.6
  Top Layer w5: R5.2 Power.2
NetR6_2: R6.2 statu.2 | length 107.5
  Top Layer w5: R6.2 2001.5,1363.5 2005,1360 statu.2
NetR7_1: R7.1 U1.5 | length 180.6
  Top Layer w5: U1.5 1453,532.76 1457.25,528.5 R7.1
NetR8_1: R8.1 U1.1 | length 196
  Top Layer w10: U1.1 1366.15,645 1467.01,645 1497.01,675 R8.1
NetR17_2: R17.2 R18.1 U3.3 | length 352.9
  Top Layer w10: U3.3 683.95,671 672.25,682.69 R17.2 672.25,726.49 610,788.75 610,827.5 694,911.5 R18.1
NRST: C5.2 IC1.7 R2.1 S1.1 | length 1491.6
  Top Layer w5: S1.1 200,1166 200.5,1166.5 C5.2 465,1277 v2(475,1287) ; v2(750.99,1226) 751.49,1226.5 R2.1 ; IC1.7 1120,1140.16 1126.36,1146.52 1126.36,1208.64 v2(1109,1226)
  Bottom Layer w5: v2(475,1287) 689.99,1287 v2(750.99,1226) v2(1109,1226)
PB12: IC1.25 R6.1 | length 967.4
  Top Layer w5: IC1.25 v2(1574.73,1041.73) ; R6.1 1938.5,1409 1969,1378.5 1969,1268 v2(1990,1247)
  Bottom Layer w5: v2(1574.73,1041.73) 1586,1053 1964,1053 1990,1079 v2(1990,1247)
POWER: C10.1 C11.2 Charge.1 U1.4 USB1.2 | length 984.8
  Top Layer w10: C11.2 1137,468.5 1138.97,470.47 C10.1 1211.42,470.47 ; USB1.2@1216.89,305 1216.89,465 1211.42,470.47 ; U1.4 1291.35,499 ; Charge.1 1540.63,271.04 1530,260.41 1339.37,260.41 1336.57,263.21 1336.57,305 1336.57,349.43 1291.35,394.65 1291.35,499 ; 1211.42,470.47 1262.82,470.47 1291.35,499
RXD1: IC1.21 J2.4 | length 1109.9
  Top Layer w5: IC1.21 1279.21,754.65 1275.83,751.27 1275.83,716.24 1299.07,693 v2(1341,693)
  Bottom Layer w5: v2(1341,693) 1389.22,644.78 1945.22,644.78 J2.4
SCL: IC1.42 J3.2 | length 738.3
  Top Layer w5: v2(1214,1421) 1239.84,1395.16 IC1.42
  Bottom Layer w5: J3.2 1013.4,1436.6 1198.4,1436.6 v2(1214,1421)
SDA: IC1.43 J3.1 | length 662.4
  Top Layer w5: IC1.43 v2(1220.16,1390)
  Bottom Layer w5: J3.1 867,1683 978.84,1683 1240,1421.84 1240,1409.84 v2(1220.16,1390)
TXD1: IC1.22 J2.3 | length 1033.5
  Top Layer w5: v2(1294,737) 1298.9,741.9 IC1.22
  Bottom Layer w5: v2(1294,737) 1294,702 1361.22,634.78 1911.22,634.78 1945,601 J2.3
VCC3.3: C1.2 C2.2 C3.2 C4.2 C12.2 IC1.1 IC1.9 IC1.24 IC1.36 IC1.48 IC2.5 J1.4 J3.4 Power.1 R2.2 statu.1 | length 3519.9
  Top Layer w10: v2(659,1684) 898,1684 1064,1518 1064,1258.27 IC1.1 1110,1258.27 1121.73,1270 1121.73,1279 ; R2.2 795.91,1163.5 829.41,1130 955,1130 984.21,1100.79 IC1.9 1140,1100.79 ; IC1.48 1121.73,1279 ; IC1.24 1338.27,1045 1229,1154.27 ; J1.4 1486.73,1258.27 IC1.36 1269.58,1258.27 1229,1217.69 1229,1154.27 ; Power.1 1864,1310 1865.06,1308.94 statu.1 1926.26,1264.74 1945,1246 C1.2 C2.2 1945,1070 ; IC2.5 1873,982.4 1906.85,1016.25 C3.2 ; v2(1900,1115) 1945,1070 ; C12.2 1937.95,840 1937.95,892.36 1945,899.41 C4.2 C3.2 ; 1121.73,1279 1152,1248.73 1152,1112.79 1140,1100.79 ; 1140,1100.79 1203.88,1100.79 1229,1125.91 1229,1154.27 ; C3.2 1945,1070
  Bottom Layer w10: J3.4 566,1684 v2(659,1684) ; J1.4 v2(1900,1115)
XTAL_A: C6.2 IC1.5 R3.1 Y1.1 | length 916.9
  Top Layer w5: Y1.1 600,1255 622.99,1232.01 R3.1 C6.2 ; IC1.5 1101.53,1179.53 v2(1109,1187)
  Bottom Layer w5: Y1.1 593,1187 v2(1109,1187)
XTAL_B: C7.2 IC1.6 R3.2 Y1.2 | length 1553.1
  Top Layer w5: Y1.2 583.15,1000 C7.2 ; R3.2 698,1295 698,1325 v2(701,1328) ; IC1.6 1107.84,1159.84 v2(1108,1160)
  Bottom Layer w5: Y1.2 921.91,1058.15 929.71,1050.34 998.34,1050.34 ; v2(701,1328) 701,1327 1083,1327 1127,1283 1127,1171.69 1005.66,1050.34 998.34,1050.34 ; v2(1108,1160) 998.34,1050.34
XTAL_C: C8.2 IC1.3 Y2.1 | length 570
  Top Layer w5: C8.2 745,1535 748.98,1531.02 Y2.1 1016,1328.77 1016,1232.9 1030,1218.9 IC1.3
XTAL_D: C9.2 IC1.4 Y2.2 | length 472.9
  Top Layer w5: C9.2 745,1405 748.98,1408.98 Y2.2 1023.51,1199.21 IC1.4
pads on no net: IC1.2 IC1.26 IC1.27 IC1.28 IC1.33 IC1.38 IC1.49 IC1.50 J5. J5.8 J6. J6.8 J7. J7.8 J8. J8.8 J9. J9.8 J10. J10.8 J11. J11.8 J12. J12.8 J13. J13.8 J14. J14.8 K1.1 K1.4 K1.5 K1.6 USB1.

## Polygon pours and split planes (outlines as drawn)
GND on Top Layer "Top Layer-GND" (solid, remove dead copper, pour order 54): 115,2365 2370,2365 2410,2325 2410,130 2370,90 135,90 135,95 115,115
VCC3.3 on Top Layer "Top Layer-VCC3.3" (solid, remove dead copper, pour order 50): 1775,1340 1955,1340 1955,1290 1950,1285 1965,1270 1965,865 1970,860 1970,820 1915,820 1890,845 1890,925 1850,965 1815,965 1815,995 1835,1015 1890,1015 1890,1100 1875,1115 1875,1185 1775,1285
POWER on Top Layer "Top Layer-POWER" (solid, remove dead copper, pour order 48): 1070,490 1070,450 1170,350 1185,350 1205,330 1205,280 1225,280 1230,285 1230,335 1240,345 1320,345 1320,275 1355,275 1355,350 1315,390 1315,550 1310,555 1280,555 1280,550 1225,495 1155,495 1150,490
BAT+ on Top Layer "Top Layer-BAT+" (solid, remove dead copper, pour order 46): 745,560 745,490 755,480 775,480 805,510 950,510 950,525 965,540 955,550 955,575 920,575 905,590 875,590 865,580 790,580 770,560
+5 on Top Layer "Top Layer-+5" (solid, remove dead copper, pour order 42): 705,560 735,560 735,490 750,475 750,340 710,340 710,505 705,510
no net on Top Layer "Top Layer-No Net" (solid, remove dead copper, pour order 37): 1120,355
GND on Bottom Layer "Bottom Layer-GND" (solid, remove dead copper, pour order 52): 115,2365 2370,2365 2410,2325 2410,130 2370,90 135,90 135,95 115,115

## Other copper
Top Layer:
  pour cut-out: -85,1025
  pour cut-out: -285,1265
  pour cut-out: 180,1175 196.13,1175 207.65,1163.48 207.65,956.26 176.26,956.26 175,955
  pour cut-out: 2450,1200
  pour cut-out: 1272.17,709.08 1270.1,707.01 1267.17,707.01 1267.17,700.64 1251.89,685.35 1299.07,685.35
  pour cut-out: 1635,1890 1648.51,1876.49 1730.28,1876.49 1730.28,1636.69 1731.97,1635 1726.97,1630 1604.23,1630 1604.23,1636.13 1591.65,1648.71 1591.65,1674.65 1624.5,1707.5 1624.5,1782.15 1623.4,1783.25
  pour cut-out: 1408.41,1977.35 1389.93,1958.87 1389.93,1920.28 1414.72,1920.28 1445.23,1889.77 1542.05,1889.77 1542.05,1984.05 1543,1985
  pour cut-out: 417.82,1254.07 433.61,1254.07 438.31,1258.76 440,1257.07 440,1235.77 430.23,1226 416.65,1239.58 416.65,1244.91
  pour cut-out: 404.33,1324.48 446.09,1324.48 446.31,1324.26 455,1332.95 455,1380 455,1795 405,1795 390,1780 390,1360
  pour cut-out: 825.51,1120.58 874.78,1071.31 902.28,1071.31 950.78,1119.8 979.21,1091.37 1036.37,1091.37 1040,1095 1128,1007 1128,882 987,882 970,865 1125,865
Bottom Layer:
  pour cut-out: 1400,1415 1396.25,1411.25 1396.25,1388.75 1400,1385 1405,1390 1653,1390 1653,1394.48 1643.13,1404.35 1589,1404.35
  pour cut-out: 575.17,2022.35 627.65,2022.35 653.23,1996.77 653.23,1951.65 577.58,1876 402.87,1876 406.87,1880 406.87,1928.11 422,1928.11

## Silkscreen, mask and mechanical layers (free items; w line width, h text height)
Top Overlay:
  text "SCL" at 675,1805 h40
  text "SDA" at 805,1805 h40
  text "VCC" at 455,1800 h40
  text "+" at 1900,1345 h40 r90
  text "+" at 1835,1340 h40
  text "VCC" at 1560,1115 h40 r90
  text "IO" at 1560,1010 h40 r90
  text "CLK" at 1560,870 h40 r90
  text "GND" at 1600,710 h40
  text "+5" at 1695,615 h40
  text "GND" at 1790,610 h40
  text "+" at 485,480 h40
  text "TXD" at 1900,440 h40
  text "RXD" at 2035,440 h40
  text "+" at 1490,405 h40
  text "-" at 475,365 h40
Mechanical 1:
  the board outline again, w10
Drill Drawing:
  text ".Lengend" at 2790,2055 h40

## Text inside footprints (layer, text, board x,y; h text height)
IC2: Mechanical 15 "1" at 1802.71,938.53 h40 r90